# Altium PCB LCD_board.PcbDoc
Units mil, origin at the board's own origin, x right, y up, seen from the top; angles counter-clockwise.
Board outline 1051.03 x 1031.35 mil, 2 copper layers (Top Layer, Bottom Layer); 7 components, 10 nets, 33 pads, 45 vias.
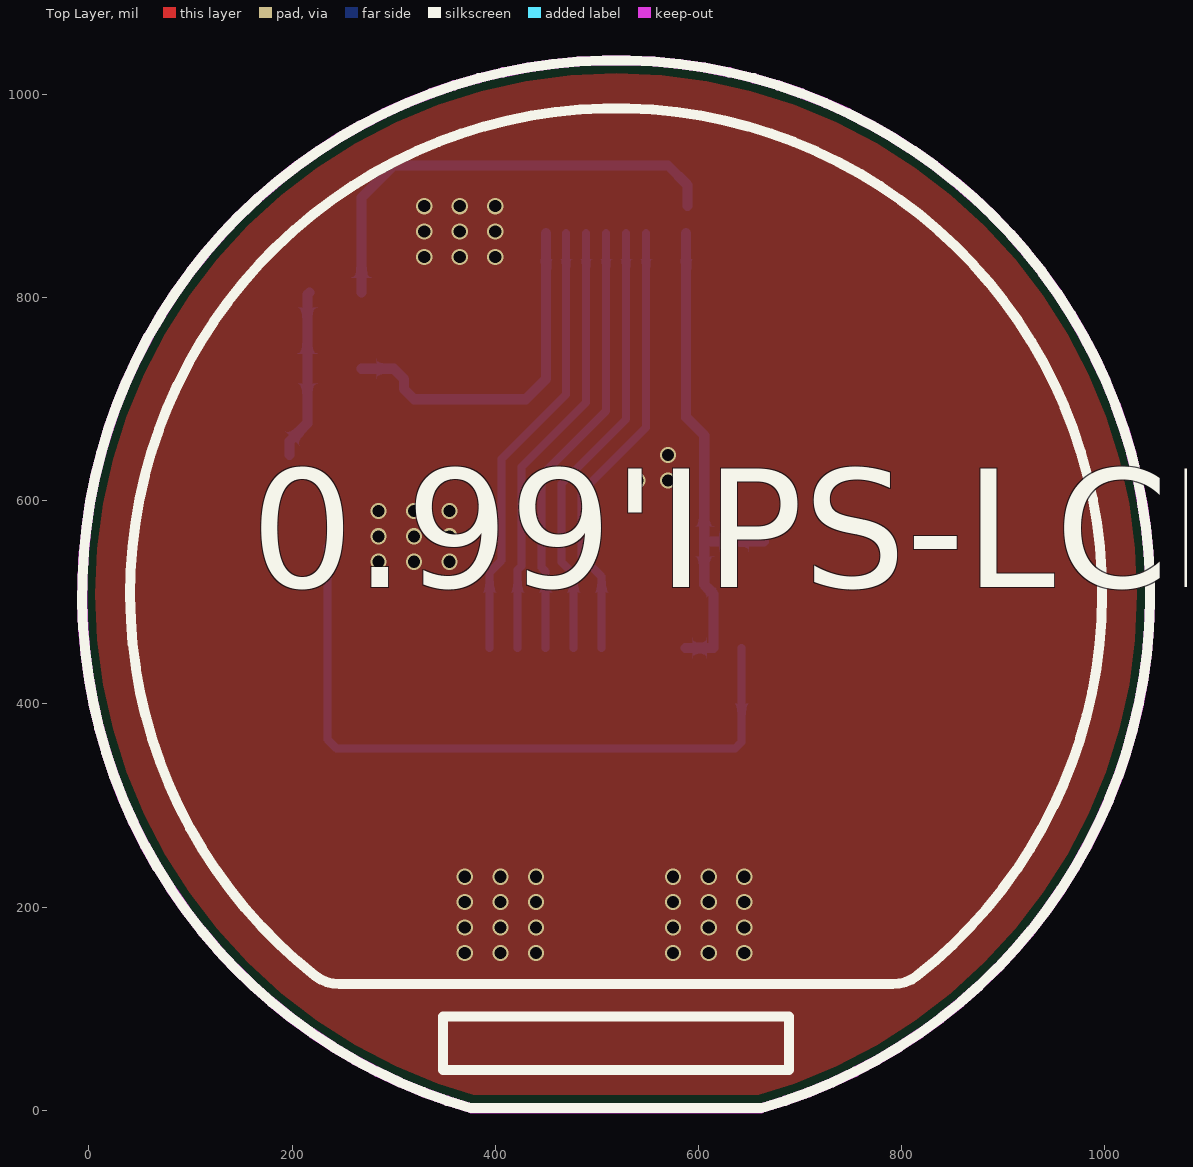
[diagram p0: Top Layer view]
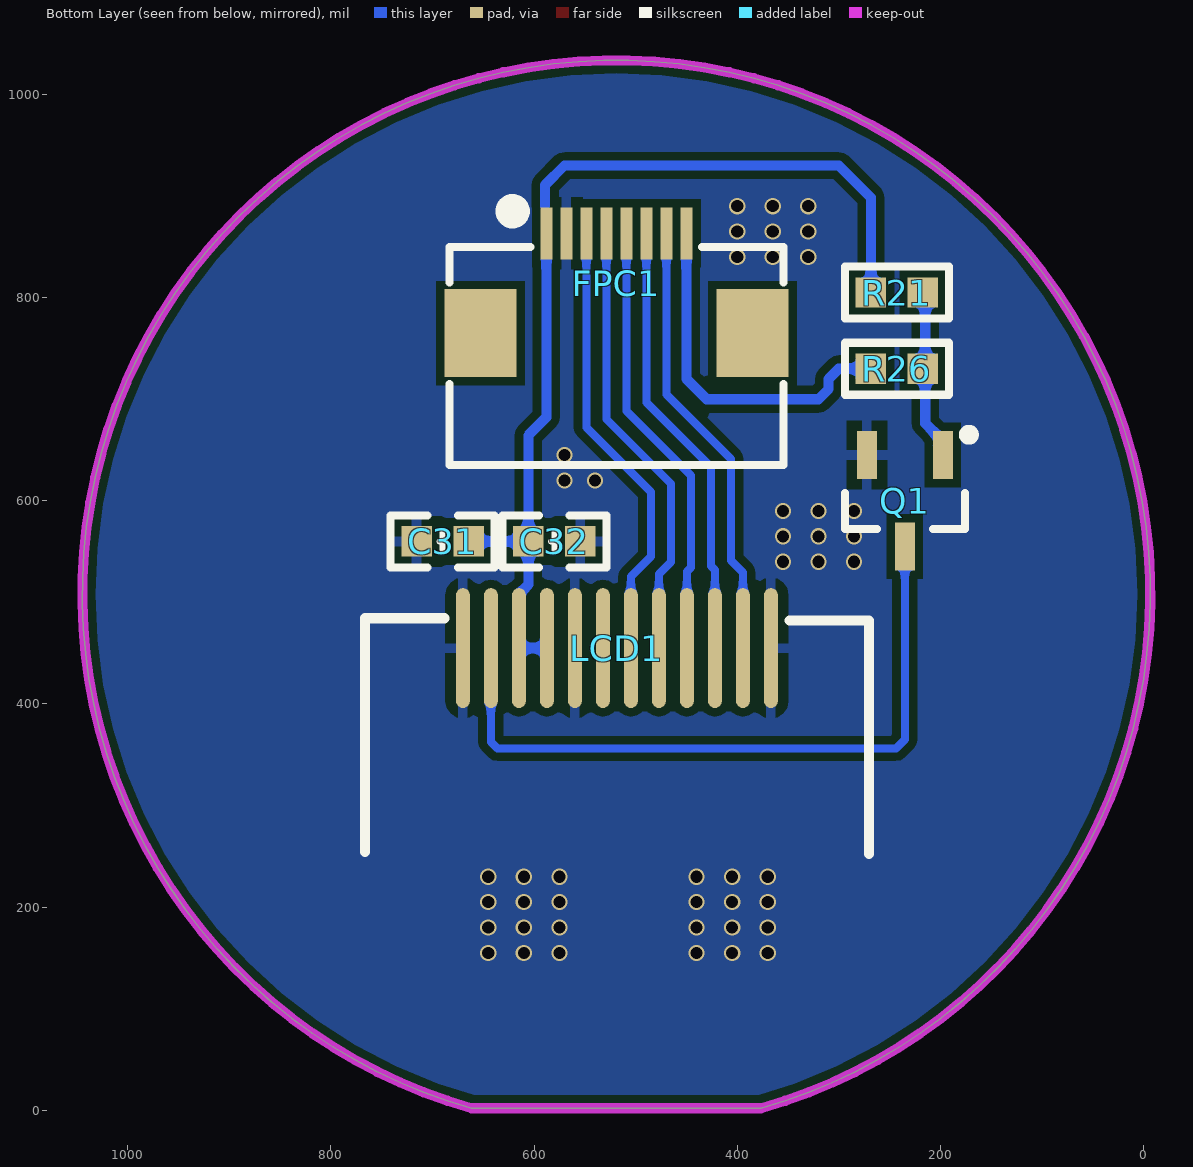
[diagram p1: Bottom Layer view, seen from below]

## Layer stack, top to bottom
Top Solder: solder mask 0.4, Solder Resist, Dk 3.5
Top Layer: signal copper 1.4
Dielectric 1: dielectric 12.6, FR-4, Dk 4.8
Bottom Layer: signal copper 1.4
Bottom Solder: solder mask 0.4, Solder Resist, Dk 3.5

## Board outline
376.56,2.17 cw(c519.05,508.07) 661.55,2.17

## Design rules (kind name [scope] priority, off if disabled: settings)
Clearance [All] p1: gap=8 ignorepadtopadclearanceinfootprint=FALSE except(0: Arc-Hole Track-Hole SMDPad-Hole THPad-Hole Via-Hole Fill-Hole Poly-Hole Region-Hole Text-Hole)
PolygonConnect [All] p1: connectstyle=Relief reliefconductorwidth=10 reliefentries=4 polygonreliefangle="90 Angle" airgapwidth=10
RoutingVias [All] p1: holewidth=28 width=50 viastyle="Through Hole" minholewidth=28 minwidth=50 maxholewidth=28 maxwidth=50
SolderMaskExpansion [All] p1: expansion=4 istentingtop=FALSE
Width [All] p1: maxlimit=10 minlimit=6 preferedwidth=8
30 further rules are at their usual default settings.

## Components (designator, comment, footprint, x,y, rotation, side; value= is the part's Value field where it differs from the comment)
C31 "4.7uF" "C 0603_L" 690,560 r180 bottom
C32 "0.1uF" "C 0603_L" 580,560 r0 bottom
FPC1 "8P" "FPC0.5 2H-WS-8P" 518.94,765 r180 bottom
LCD1 "0.99‘IPS LCD显示屏" LCD-SMD_0.99’IPS-LCD 33.42,12.24 r0 top
Q1 "SS8050" SOT23-3N 235,600 r0 bottom
R21 "10K" "R 0603_L" 242.76,805 r0 bottom
R26 "1K" "R 0603_L" 242.75,730 r180 bottom

## Footprints (in the part's own frame and the unit in brackets; to place one, negate y for a bottom-side part, rotate by r counter-clockwise, add the part's x,y. Pads: shape width x height; smd on the part's side, far side on the other; paste and mask are expansions set on the pad)
"C 0603_L" [mil] "无极性贴片电容                                       淘宝ID:黄晶宝石"
  rect 30x30 smd: 1(-25.59,0) 2(25.59,0)
  silkscreen extent -51,-26 51,26, body extent -31,-16 31,16, height 32
"FPC0.5 2H-WS-8P" [mm] "长：8.2mm，宽：5.2mm，高：2mm 淘宝ID:黄晶宝石   店铺网址:https://shop463601444.taobao.com"
  rect 1.8x2.2 smd: 0(-3.4,0) 0(3.4,0)
  rect 0.3x1.3 smd: 1(-1.75,2.497) 2(-1.25,2.497) 3(-0.75,2.497) 4(-0.25,2.497) 5(0.25,2.497) 6(0.75,2.497) 7(1.25,2.497) 8(1.75,2.497)
  silkscreen extent -4.17,-3.3 4.17,3.23, body extent -4.1,-3.15 4.1,2.85, height 2
LCD-SMD_0.99’IPS-LCD [mm]
  oval 0.35x3 smd far side: 1(16.169,11.246) 2(15.469,11.246) 3(14.769,11.246) 4(14.069,11.246) 5(13.369,11.246) 6(12.669,11.246) 7(11.969,11.246) 8(11.269,11.246) 9(10.569,11.246) 10(9.869,11.246) 11(9.169,11.246) 12(8.469,11.246)
  silkscreen extent -1.02,-0.26 25.68,25.94
"R 0603_L" [mil] "1/10W贴片电阻                 淘宝ID:黄晶宝石"
  rect 30x30 smd: 1(-25.59,0) 2(25.59,0)
  silkscreen extent -51,-26 51,26, body extent -31,-16 31,16, height 16
SOT23-3N [mm] "3x1.3x1mm(长宽高)    封装库来自淘宝卖家 ID：黄晶宝石"
  rect 0.5x1.2 smd: 1(-0.95,-1.143) 2(0.95,-1.143) 3(0,1.143)
  silkscreen extent -1.72,-1.78 1.5,0.7, body extent -1.5,-1.2 1.5,1.2, height 1.05

## Part data
C31 C32: library part C, "贴片电容", BOM名称=无极性贴片电容, 淘宝ID="封装库来自淘宝 ID：黄晶宝石", 联系售后=https://shop463601444.taobao.com
LCD1: "128*115RGB 12P焊接圆屏"
Q1: library part 8050-SMD, "高频放大-NPN型", BOM名称=高频放大-NPN型, 属性="40V 1.5A 1W 100MHZ", 版权归属="封装库来自淘宝 ID：黄晶宝石", 联系售后=https://shop463601444.taobao.com
R21 R26: library part R, "贴片电阻", BOM名称=贴片电阻, 版权归属="来自淘宝 ID：黄晶宝石", 联系售后=https://shop463601444.taobao.com

## Via types
v1: diameter 16, hole 12, Top Layer to Bottom Layer, tented both sides, 45 vias

## Nets (pads, with @x,y where several pads share a name; then routed paths per layer and width w, separated by ;. In a path a pad name is that pad's centre, name@x,y a point inside that pad or via, vN(x,y) a via of type N, cw(c..) or ccw(c..) an arc to the next point about the centre after c; other vN are vias at no path point)
3V3: C31.2 C32.2 FPC1.1 LCD1.3 LCD1.4 R21.2 | length 961.9
  Bottom Layer w10: R21.2 268.35,898.35 300,930 570,930 589.05,910.95 589.05,890 ; LCD1.4 LCD1.3 614.88,508.19 605.59,517.48 C32.2 ; FPC1.1 587.83,682.17 605.59,664.41 C32.2 ; C31.2 C32.2
BLK: FPC1.8 R26.1 | length 351.5
  Bottom Layer w10: R26.1 300,730 310,720 310,710 320,700 430,700 450.04,720.04 FPC1.8
CS: FPC1.4 LCD1.8 | length 439.5
  Bottom Layer w8: LCD1.8 477.09,527.91 465.32,539.68 465.32,616.8 528.78,680.26 FPC1.4
D/C: FPC1.3 LCD1.7 | length 442.7
  Bottom Layer w8: LCD1.7 504.65,525.35 485,545 485,608.64 548.46,672.11 FPC1.3
GND: C31.1 C32.1 FPC1.2 LCD1.1 LCD1.5 LCD1.12 Q1.2
  other v1: 370,155 405,155 440,155 575,155 610,155 645,155 370,180 405,180 440,180 575,180 610,180 645,180 370,205 405,205 440,205 575,205 610,205 645,205 370,230 405,230 440,230 575,230 610,230 645,230 285,540 320,540 355,540 285,565 320,565 355,565 285,590 320,590 355,590 540,620 570,620 570,645 330,840 365,840 400,840 330,865 365,865 400,865 330,890 365,890 400,890
LEDK: LCD1.2 Q1.3 | length 696.3
  Bottom Layer w8: Q1.3 235,365 243.87,356.13 636.13,356.13 642.44,362.44 LCD1.2
MOSI: FPC1.6 LCD1.10 | length 436.2
  Bottom Layer w8: LCD1.10 421.97,531.97 425.94,535.94 425.94,633.11 489.41,696.57 FPC1.6
NetQ1_1: Q1.1 R21.1 R26.2 | length 168.1
  Bottom Layer w10: Q1.1 197.6,658.78 215,676.18 215,802.84 R21.1
REST: FPC1.7 LCD1.11 | length 439.5
  Bottom Layer w8: LCD1.11 394.41,529.41 406.26,541.26 406.26,641.26 469.72,704.72 FPC1.7
SCK: FPC1.5 LCD1.9 | length 436.2
  Bottom Layer w8: LCD1.9 449.53,530.47 445.63,534.37 445.63,624.95 509.09,688.42 FPC1.5
pads on no net: FPC1.0 LCD1.6

## Polygon pours and split planes (outlines as drawn)
GND on Top Layer "GND_L01_P000" (solid, pour order 0): 376.48,2.17 cw(c518.98,508.07) 661.47,2.17
GND on Bottom Layer "GND_L02_P001" (solid, pour order 1): 376.48,7.17 cw(c518.98,513.07) 661.47,7.17

## Keep-outs
Keep-Out Layer:
  the board outline again, w10

## Silkscreen, mask and mechanical layers (free items; w line width, h text height)
Top Overlay:
  text "0.99'IPS-LCD" at 159.44,476.66 h200
Mechanical 1:
  the board outline again, w10